# Altium PCB FPGA_board.PcbDoc (part 5 of 7)
Units mm, origin at the board's own origin, x right, y up, seen from the top; angles counter-clockwise.
Board outline 120 x 95 mm, 2 copper layers (Top Layer, Bottom Layer); 242 components, 219 nets, 1224 pads, 430 vias.
Unrouted connection lines stored in the file: 9.
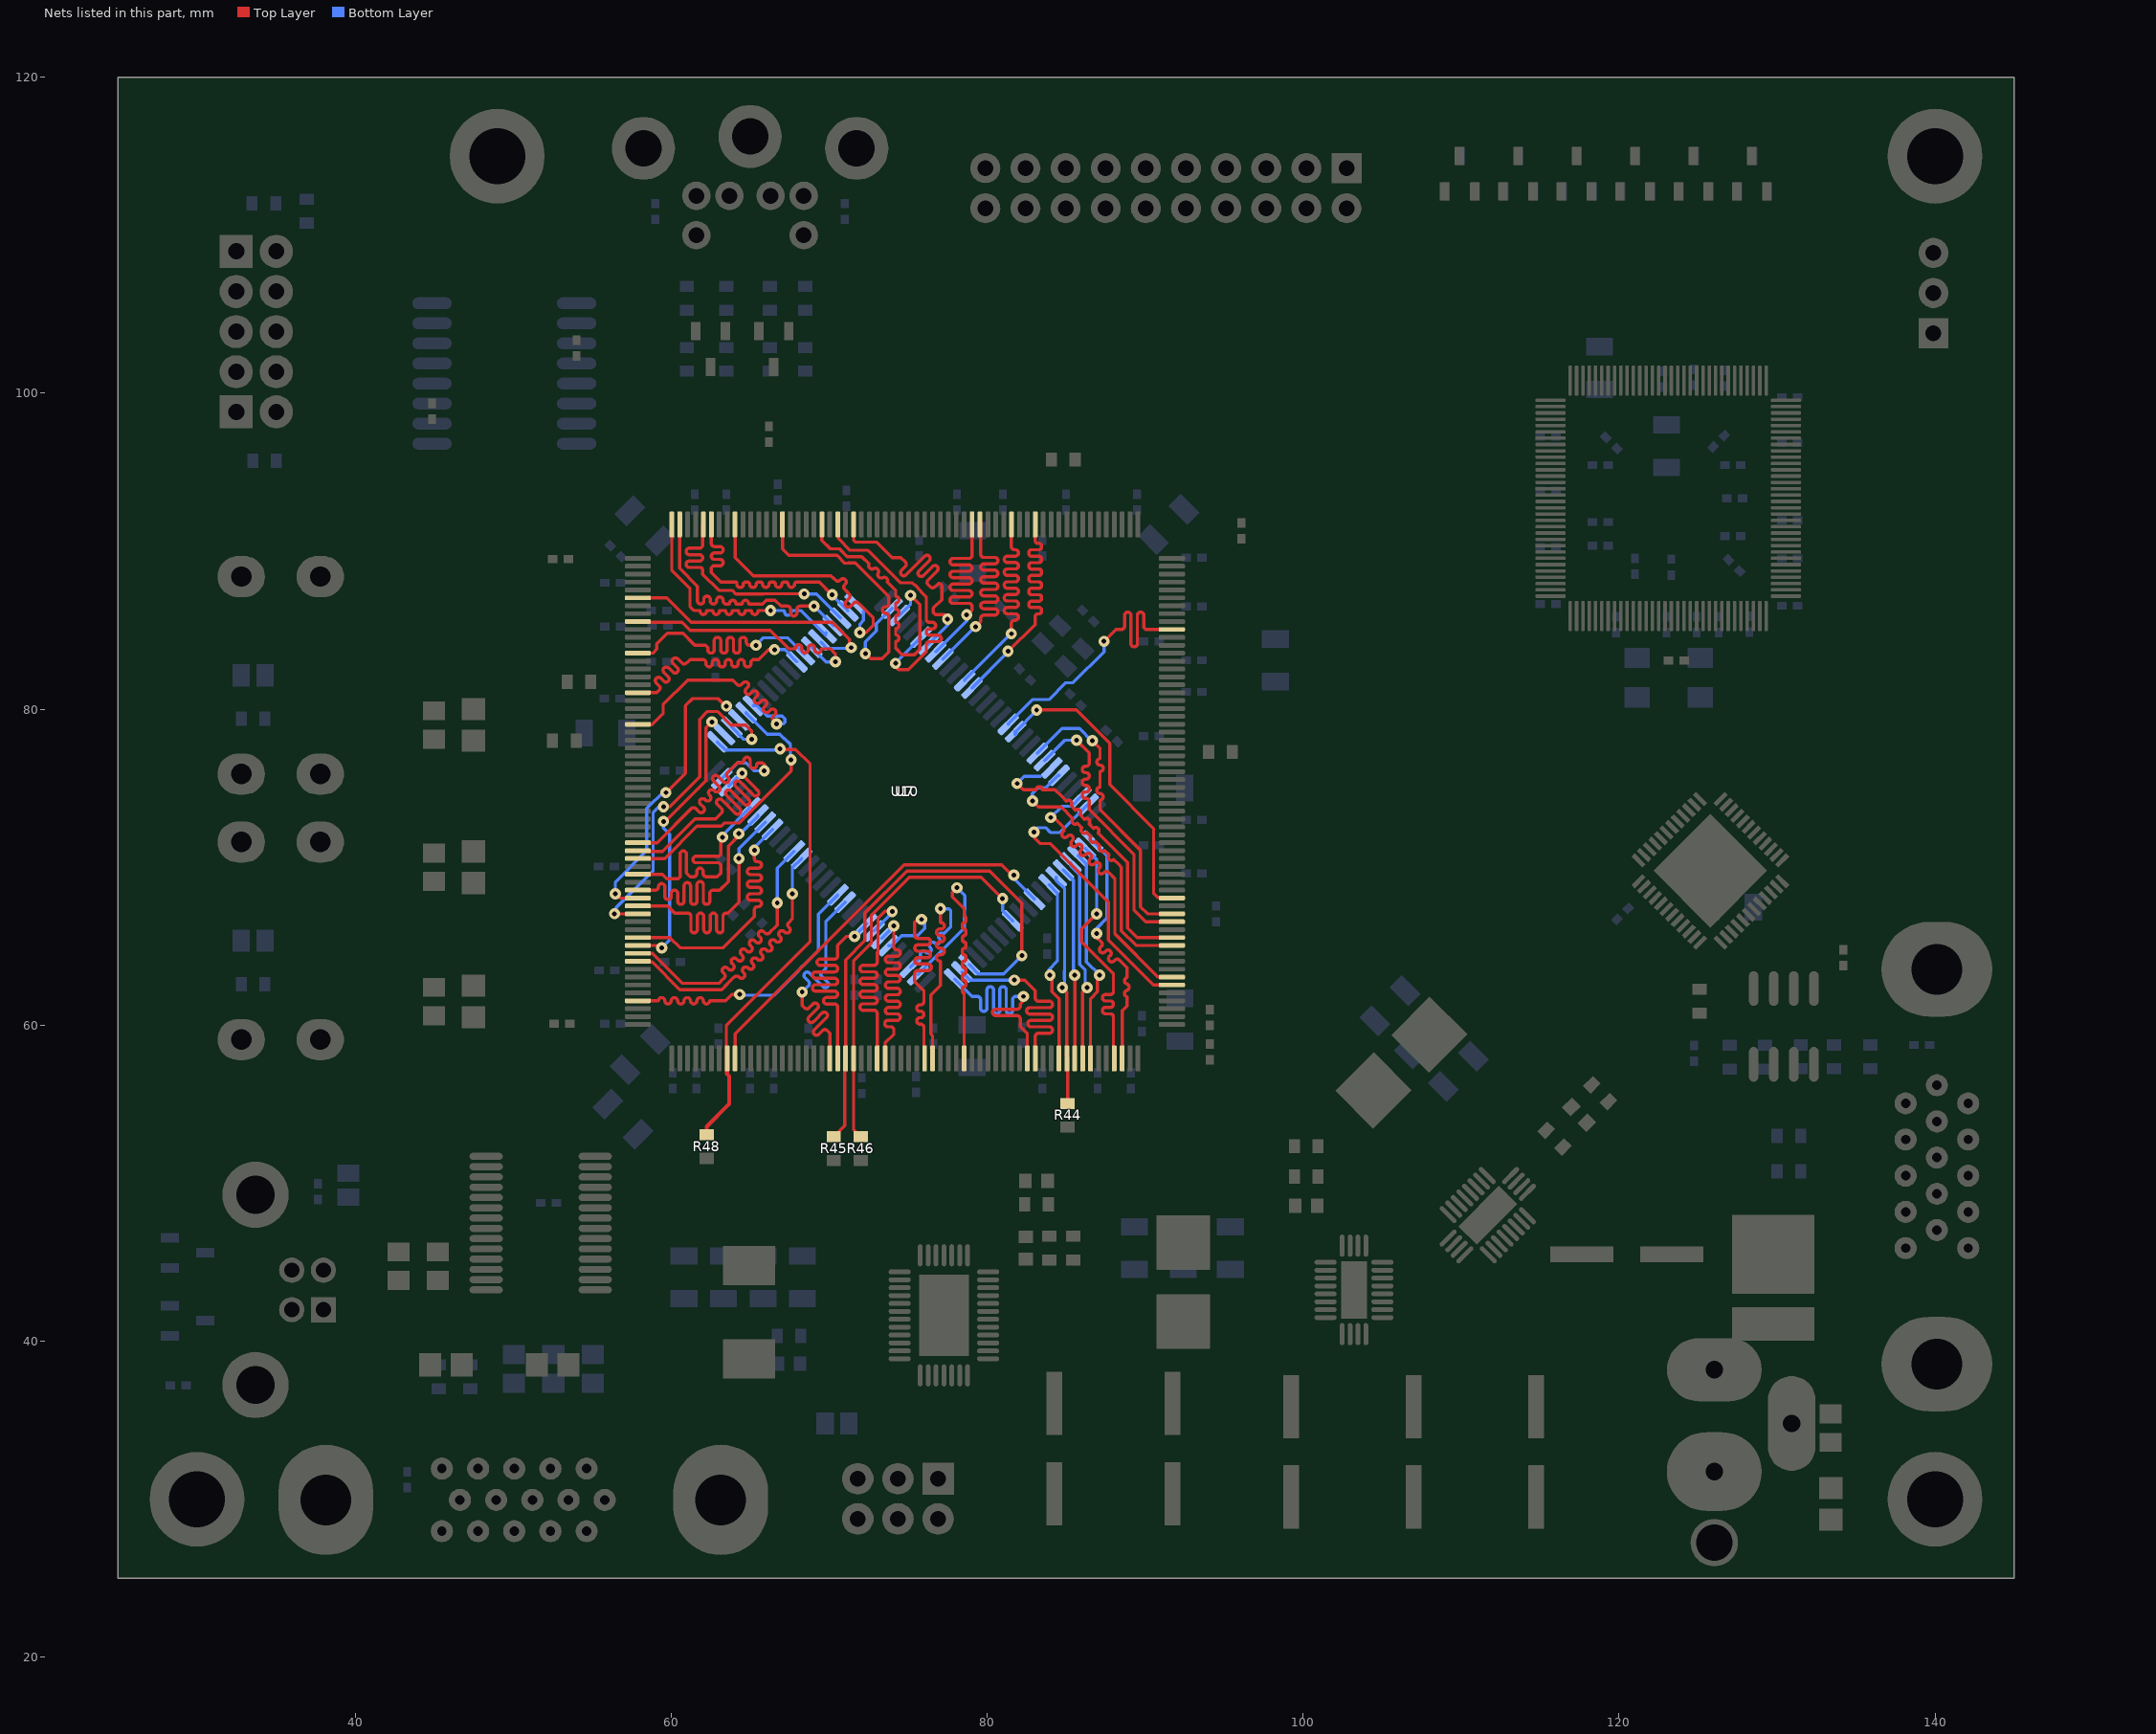
[diagram p5: the nets of this part, all layers, seen from the top]

## Via types
v1: diameter 0.71, hole 0.3, Top Layer to Bottom Layer, 393 vias
v2: diameter 1.4, hole 0.6, Top Layer to Bottom Layer, 32 vias
v3: diameter 2, hole 0.9, Top Layer to Bottom Layer, 4 vias
v4: diameter 1.2, hole 0.5, Top Layer to Bottom Layer, 1 vias

## Nets (pads, with @x,y where several pads share a name; then routed paths per layer and width w, separated by ;. In a path a pad name is that pad's centre, name@x,y a point inside that pad or via, vN(x,y) a via of type N, cw(c..) or ccw(c..) an arc to the next point about the centre after c; other vN are vias at no path point) (continued)
SRAM_ADDR1: U7.22 U10.36 | length 17.6
  Top Layer w0.203: U7.22@57.9,79.05 57.925,79.025 58.802,79.025 59.5,79.723 59.5,80.293 61.057,81.85 63.9,81.85 64.175,81.575 ccw(c64.319,81.719) 64.462,81.575 64.564,81.677 cw(c64.707,81.533) 64.851,81.677 cw(c64.707,81.533) 64.851,81.39 64.749,81.288 ccw(c64.893,81.144) 64.749,81.001 ccw(c64.893,81.144) 65.036,81.001 65.138,81.103 cw(c65.282,80.959) 65.425,81.103 cw(c65.282,80.959) 65.425,80.816 65.323,80.714 ccw(c65.467,80.57) 65.323,80.427 ccw(c65.467,80.57) 65.61,80.427 65.712,80.528 cw(c65.856,80.385) 65.999,80.528 cw(c65.856,80.385) 65.999,80.241 65.898,80.14 ccw(c66.041,79.996) 65.898,79.852 ccw(c66.041,79.996) 66.185,79.852 66.286,79.954 cw(c66.43,79.811) 66.574,79.954 cw(c66.43,79.811) 66.574,79.667 66.472,79.565 ccw(c66.615,79.422) 66.472,79.278 v1(66.675,79.075)
  Bottom Layer w0.203: U10.36@65.219,80.245 65.415,80.245 66.087,79.572 67.028,79.572 67.213,79.387 67.213,79.163 67.125,79.075 v1(66.675,79.075)
SRAM_ADDR2: U7.50 U10.32 | length 17.7
  Top Layer w0.203: U7.50@57.9,65.05 59.256,65.05 v1(59.406,64.9) ; v1@59.525,73.05 59.775,73.05 62.215,75.49 62.215,78.832 v1(62.586,79.204)
  Bottom Layer w0.203: v1@59.4,64.906 v1(59.406,64.9) 59.9,65.394 59.9,72.1 59.525,72.475 v1@59.525,73.05
  other v1: 59.525,72.9
SRAM_ADDR3: U7.46 U10.33 | length 22.4
  Top Layer w0.203: v1@56.52,67.255 56.52,67.105 56.575,67.05 U7.46@57.9,67.05 ; v1(59.525,73.827) 59.922,73.827 61.812,75.717 61.812,79.358 62.314,79.86 62.927,79.86 63.8,78.987 64.738,78.987 65.1,78.625 v1(65.1,78.1)
  Bottom Layer w0.203: v1@56.52,67.255 56.52,67.442 58.869,69.79 58.869,73.468 59.227,73.827 v1(59.525,73.827) ; U10.33@63.84,78.866 64.606,78.1 v1(65.1,78.1)
  other v1: 56.42,67.055
SRAM_ADDR4: U7.44 U10.34 | length 18.2
  Top Layer w0.203: v1(56.475,68.325) 56.75,68.05 U7.44@57.9,68.05 ; v1@59.839,74.889 60.9,75.95 60.9,80.225 61.35,80.675 62.972,80.675 v1@63.515,80.132 ; v1(63.511,80.204) 63.515,80.2 v1@63.515,80.11
  Bottom Layer w0.203: v1(56.475,68.325) 56.475,69.075 58.466,71.065 58.466,73.716 v1@59.575,74.825
  other v1: 59.675,74.725
SRAM_ADDR5: U7.39 U10.35 | length 17.3
  Top Layer w0.203: U7.39@57.9,70.55 59.6,70.55 61.65,72.6 63.17,72.6 63.37,72.8 64.3,72.8 67.6,76.1 v1(67.6,76.8)
  Bottom Layer w0.203: U10.35@64.759,79.785 64.759,79.741 66.081,78.418 66.882,78.418 67.144,78.156 67.172,78.156 67.556,77.772 67.556,76.844 v1(67.6,76.8)
SRAM_ADDR6: U7.18 U10.42 | length 17.3
  Top Layer w0.203: U7.18@57.9,81.05 59.1,81.05 59.25,81.2 ccw(c59.107,81.344) 59.25,81.487 59.064,81.673 cw(c59.207,81.817) 59.064,81.96 cw(c59.207,81.817) 59.351,81.96 59.537,81.774 ccw(c59.681,81.918) 59.824,81.774 ccw(c59.681,81.918) 59.824,82.061 59.555,82.33 cw(c59.699,82.474) 59.556,82.617 cw(c59.699,82.474) 59.843,82.617 60.111,82.348 ccw(c60.255,82.492) 60.398,82.348 ccw(c60.255,82.492) 60.398,82.635 60.13,82.904 cw(c60.273,83.048) 60.13,83.191 cw(c60.273,83.048) 60.417,83.191 60.685,82.923 ccw(c60.829,83.066) 60.973,82.923 61.025,82.975 61.2,83.15 62.006,83.15 cw(c62.006,82.947) 62.209,82.947 62.209,82.887 ccw(c62.412,82.887) 62.412,82.684 ccw(c62.412,82.887) 62.615,82.887 62.615,82.947 cw(c62.818,82.947) 62.818,83.15 cw(c62.818,82.947) 63.021,82.947 63.021,82.879 ccw(c63.224,82.879) 63.224,82.676 ccw(c63.224,82.879) 63.427,82.879 63.427,82.947 cw(c63.63,82.947) 63.63,83.15 cw(c63.63,82.947) 63.833,82.947 63.833,82.879 ccw(c64.036,82.879) 64.036,82.676 ccw(c64.036,82.879) 64.239,82.879 64.239,82.947 cw(c64.442,82.947) 64.442,83.15 cw(c64.442,82.947) 64.645,82.947 64.645,82.879 ccw(c64.848,82.879) 64.848,82.676 ccw(c64.848,82.879) 65.051,82.879 65.051,82.947 cw(c65.254,82.947) 65.254,83.15 65.55,83.15 66.175,83.775 v1(66.55,83.775)
  Bottom Layer w0.203: v1(66.55,83.775) 67.204,83.775 U10.42@67.976,83.002
SRAM_ADDR7: U7.13 U10.43 | length 17
  Top Layer w0.203: U7.13@57.9,83.55 58.85,83.55 59.1,83.8 59.1,84.128 59.772,84.8 60.75,84.8 61.5,84.05 62.18,84.05 62.33,83.9 62.33,83.753 ccw(c62.533,83.753) 62.533,83.55 ccw(c62.533,83.753) 62.736,83.753 62.736,84.347 cw(c62.939,84.347) 62.939,84.55 cw(c62.939,84.347) 63.142,84.347 63.142,83.753 ccw(c63.345,83.753) 63.345,83.55 ccw(c63.345,83.753) 63.548,83.753 63.548,84.347 cw(c63.751,84.347) 63.751,84.55 cw(c63.751,84.347) 63.954,84.347 63.954,83.753 ccw(c64.157,83.753) 64.157,83.55 ccw(c64.157,83.753) 64.36,83.753 64.36,84.347 cw(c64.563,84.347) 64.563,84.55 cw(c64.563,84.347) 64.766,84.347 64.766,84.253 ccw(c64.969,84.253) 64.969,84.05 v1(65.375,84.05)
  Bottom Layer w0.203: v1(65.375,84.05) 65.85,84.525 67.373,84.525 U10.43@68.436,83.462
SRAM_ADDR8: U7.9 U10.44 | length 17
  Top Layer w0.203: U7.9@57.9,85.55 57.949,85.501 60.704,85.501 61.205,85 66.28,85 67.455,83.825 67.826,83.825 ccw(c67.826,83.872) 67.873,83.872 cw(c68.076,83.872) 68.076,84.075 cw(c68.076,83.872) 68.279,83.872 68.279,83.778 ccw(c68.482,83.778) 68.482,83.575 ccw(c68.482,83.778) 68.685,83.778 68.685,83.872 cw(c68.888,83.872) 68.888,84.075 cw(c68.888,83.872) 69.091,83.872 69.091,83.778 ccw(c69.294,83.778) 69.294,83.575 ccw(c69.294,83.778) 69.497,83.778 cw(c69.544,83.778) 69.544,83.825 70.075,83.825 70.4,83.5 v1(70.4,83)
  Bottom Layer w0.203: U10.44@68.896,83.922 69.817,83 v1(70.4,83)
SRAM_ADDR9: U7.6 U10.45 | length 17.1
  Top Layer w0.203: U7.6@57.9,87.05 59.725,87.05 59.877,86.898 60.261,86.514 61.275,85.5 70.2,85.5 71.294,84.406 71.294,84.006 v1(71.4,83.9)
  Bottom Layer w0.203: U10.45@69.5,84.237 69.886,83.851 71.351,83.851 v1(71.4,83.9)
SRAM_ADDR10: U7.240 U10.46 | length 17
  Top Layer w0.203: U7.240@60.05,91.7 60.05,88.778 61.2,87.628 61.2,86.486 61.437,86.248 61.794,86.248 cw(c61.794,86.199) 61.843,86.199 ccw(c62.046,86.199) 62.046,85.996 ccw(c62.046,86.199) 62.249,86.199 cw(c62.298,86.199) 62.298,86.248 62.606,86.248 cw(c62.606,86.199) 62.655,86.199 ccw(c62.858,86.199) 62.858,85.996 ccw(c62.858,86.199) 63.061,86.199 cw(c63.11,86.199) 63.11,86.248 63.418,86.248 cw(c63.418,86.199) 63.467,86.199 ccw(c63.67,86.199) 63.67,85.996 ccw(c63.67,86.199) 63.873,86.199 cw(c63.922,86.199) 63.922,86.248 64.23,86.248 cw(c64.23,86.199) 64.279,86.199 ccw(c64.482,86.199) 64.482,85.996 ccw(c64.482,86.199) 64.685,86.199 cw(c64.734,86.199) 64.734,86.248 65.042,86.248 cw(c65.042,86.199) 65.091,86.199 ccw(c65.294,86.199) 65.294,85.996 ccw(c65.294,86.199) 65.497,86.199 cw(c65.546,86.199) 65.546,86.248 66.299,86.248 v1(66.3,86.25)
  Bottom Layer w0.203: v1(66.3,86.25) 67.084,86.25 cw(c67.084,86.143) 67.191,86.143 ccw(c67.394,86.143) 67.394,85.94 ccw(c67.394,86.143) 67.597,86.143 cw(c67.704,86.143) 67.704,86.25 68.21,86.25 69.775,84.685 69.775,84.801 U10.46@69.815,84.841
SRAM_ADDR11: U7.239 U10.47 | length 17.4
  Top Layer w0.203: U7.239@60.55,91.7 60.538,91.688 60.538,88.92 61.668,87.79 61.668,86.863 ccw(c61.871,86.863) 61.871,86.66 ccw(c61.871,86.863) 62.074,86.863 62.074,86.957 cw(c62.277,86.957) 62.277,87.16 cw(c62.277,86.957) 62.48,86.957 62.48,86.863 ccw(c62.683,86.863) 62.683,86.66 ccw(c62.683,86.863) 62.886,86.863 62.886,86.904 cw(c63.089,86.904) 63.089,87.107 cw(c63.089,86.904) 63.292,86.904 63.292,86.863 ccw(c63.495,86.863) 63.495,86.66 63.664,86.66 ccw(c63.664,86.694) 63.698,86.694 cw(c63.901,86.694) 63.901,86.897 cw(c63.901,86.694) 64.104,86.694 ccw(c64.138,86.694) 64.138,86.66 64.476,86.66 ccw(c64.476,86.694) 64.51,86.694 cw(c64.713,86.694) 64.713,86.897 cw(c64.713,86.694) 64.916,86.694 ccw(c64.95,86.694) 64.95,86.66 65.782,86.66 66.028,86.907 66.572,86.907 66.953,86.525 67.156,86.525 67.359,86.525 cw(c67.359,86.322) 67.562,86.322 67.562,86.106 ccw(c67.765,86.106) 67.765,85.903 ccw(c67.765,86.106) 67.968,86.106 67.968,86.322 cw(c68.171,86.322) 68.171,86.525 68.374,86.525 68.6,86.525 v1(69.05,86.525)
  Bottom Layer w0.203: v1(69.05,86.525) U10.47@70.275,85.301
SRAM_ADDR12: U7.236 U10.48 | length 16.7
  Top Layer w0.203: U7.236@62.05,91.7 62.002,91.651 62.002,90.8 62.002,90.597 62.002,90.394 cw(c61.799,90.394) 61.799,90.191 61.156,90.191 ccw(c61.156,89.988) 60.953,89.988 ccw(c61.156,89.988) 61.156,89.785 61.799,89.785 cw(c61.799,89.582) 62.002,89.582 cw(c61.799,89.582) 61.799,89.379 61.156,89.379 ccw(c61.156,89.176) 60.953,89.176 ccw(c61.156,89.176) 61.156,88.973 61.829,88.973 cw(c61.829,88.8) 62.002,88.8 62.002,88.536 63.016,87.522 63.88,87.522 64.102,87.3 ; 64.2,87.288 64.114,87.288 64.102,87.3 ; v1(68.425,87.3) 68.416,87.31 65.861,87.31 65.852,87.3 64.102,87.3
  Bottom Layer w0.203: v1(68.425,87.3) 69.204,87.3 70.734,85.769 U10.48@70.734,85.76
SRAM_ADDR13: U7.235 U10.49 | length 17
  Top Layer w0.203: U7.235@62.55,91.7 62.55,90.5 ccw(c62.753,90.5) 62.753,90.297 63.097,90.297 cw(c63.097,90.094) 63.3,90.094 cw(c63.097,90.094) 63.097,89.891 62.753,89.891 ccw(c62.753,89.688) 62.55,89.688 ccw(c62.753,89.688) 62.753,89.485 63.097,89.485 cw(c63.097,89.282) 63.3,89.282 cw(c63.097,89.282) 63.097,89.079 62.729,89.079 ccw(c62.729,88.9) 62.55,88.9 62.55,88.65 63.153,88.047 64.1,88.047 cw(c64.1,87.978) 64.168,87.978 64.168,87.906 ccw(c64.371,87.906) 64.371,87.703 ccw(c64.371,87.906) 64.574,87.906 cw(c64.715,87.906) 64.715,88.046 64.839,88.047 cw(c64.839,87.906) 64.98,87.906 ccw(c65.183,87.906) 65.183,87.703 ccw(c65.183,87.906) 65.386,87.906 cw(c65.527,87.906) 65.527,88.046 65.661,88.047 cw(c65.661,87.915) 65.792,87.915 ccw(c65.995,87.915) 65.995,87.712 ccw(c65.995,87.915) 66.198,87.915 cw(c66.329,87.915) 66.329,88.046 66.473,88.047 cw(c66.473,87.915) 66.604,87.915 ccw(c66.807,87.915) 66.807,87.712 ccw(c66.807,87.915) 67.01,87.915 cw(c67.141,87.915) 67.141,88.046 67.285,88.047 cw(c67.285,87.915) 67.416,87.915 ccw(c67.619,87.915) 67.619,87.712 ccw(c67.619,87.915) 67.822,87.915 cw(c67.953,87.915) 67.953,88.046 69.385,88.047 v1@70.191,87.241
  Bottom Layer w0.203: v1@70.182,87.232 U10.49@71.194,86.22
  other v1: 70.2,87.25
SRAM_ADDR14: U7.232 U10.50 | length 19.8
  Top Layer w0.203: U7.232@64.05,91.7 64.069,91.681 64.069,89.581 64.2,89.45 64.344,89.307 64.631,89.019 64.918,88.732 65.2,88.45 65.403,88.45 65.809,88.45 ; 66.215,88.45 65.809,88.45 ; 66.621,88.45 65.809,88.45 ; 67.027,88.45 65.809,88.45 ; 69.463,88.45 69.869,88.45 ; v1(71.95,84.85) 72.325,84.85 72.8,85.325 72.8,85.775 71.988,86.587 71.848,86.727 ccw(c71.704,86.584) 71.56,86.727 71.353,86.52 cw(c71.209,86.663) 71.065,86.52 cw(c71.209,86.663) 71.065,86.807 71.273,87.015 ccw(c71.13,87.158) 71.273,87.302 71.13,87.445 70.986,87.589 cw(c71.13,87.732) 70.986,87.876 71.028,87.917 ccw(c70.884,88.061) 71.028,88.205 ccw(c70.884,88.061) 70.741,88.205 70.699,88.163 cw(c70.556,88.306) 70.412,88.163 70.269,88.306 70.125,88.45 69.869,88.45 ; 65.809,88.45 67.433,88.45 67.839,88.45 68.245,88.45 68.651,88.45 69.057,88.45 69.869,88.45
  Bottom Layer w0.203: v1(71.95,84.85) 71.95,85.383 72.184,85.617 U10.50@72.184,86.187
SRAM_ADDR15: U7.118 U10.81 | length 17
  Top Layer w0.203: v1(86.938,65.803) 86.938,65.562 87.227,65.273 cw(c87.083,65.13) 87.227,64.986 87.174,64.933 ccw(c87.317,64.79) 87.174,64.646 ccw(c87.317,64.79) 87.461,64.646 87.514,64.699 cw(c87.657,64.556) 87.801,64.699 cw(c87.657,64.556) 87.801,64.412 87.748,64.359 ccw(c87.891,64.216) 87.748,64.072 ccw(c87.891,64.216) 88.035,64.072 88.088,64.125 cw(c88.231,63.981) 88.375,64.125 88.85,63.65 88.85,63.019 ccw(c88.912,62.816) 88.85,62.613 cw(c88.788,62.41) 88.85,62.207 ccw(c88.912,62.004) 88.85,61.801 88.85,61.225 88.55,60.925 U7.118@88.55,57.9
  Bottom Layer w0.203: U10.81@86.679,71.653 87.594,70.739 87.594,66.781 86.938,66.125 v1(86.938,65.803)
SRAM_ADDR16: U7.117 U10.82 | length 17.2
  Top Layer w0.203: v1(86.938,67.053) 85.975,66.091 85.975,65.275 88.002,63.248 88.002,62.55 88.002,62.347 88.002,62.144 cw(c87.799,62.144) 87.799,61.941 87.505,61.941 ccw(c87.505,61.738) 87.302,61.738 ccw(c87.505,61.738) 87.505,61.535 87.799,61.535 cw(c87.799,61.332) 88.002,61.332 cw(c87.799,61.332) 87.799,61.129 87.505,61.129 ccw(c87.505,60.926) 87.302,60.926 ccw(c87.505,60.926) 87.505,60.723 87.799,60.723 cw(c87.799,60.52) 88.002,60.52 ; 88.002,60.317 88.002,60.52 ; U7.117@88.05,57.9 88.002,57.948 88.002,60.075 88.002,60.52
  Bottom Layer w0.203: U10.82@86.22,71.194 86.938,70.476 v1(86.938,67.053)
SRAM_ADDR17: U7.107 U10.99 | length 17
  Top Layer w0.203: v1(81.732,62.86) 82.39,62.86 83.05,62.2 83.05,61.725 ccw(c83.253,61.725) 83.253,61.522 83.944,61.522 cw(c83.944,61.319) 84.147,61.319 cw(c83.944,61.319) 83.944,61.116 82.706,61.116 ccw(c82.706,60.913) 82.503,60.913 ccw(c82.706,60.913) 82.706,60.71 83.944,60.71 cw(c83.944,60.507) 84.147,60.507 cw(c83.944,60.507) 83.944,60.304 82.781,60.304 ccw(c82.781,60.101) 82.578,60.101 ccw(c82.781,60.101) 82.781,59.898 83.944,59.898 cw(c83.944,59.695) 84.147,59.695 cw(c83.944,59.695) 83.944,59.492 83.253,59.492 ccw(c83.253,59.289) 83.05,59.289 U7.107@83.05,57.9
  Bottom Layer w0.203: U10.99@78.406,63.38 78.937,62.85 81.722,62.85 v1(81.732,62.86)
SRAM_ADDR18: U7.106 U10.100 | length 19.9
  Top Layer w0.203: v1(82.3,61.825) 82.3,61.55 82.1,61.35 82.1,61.219 cw(c81.897,61.219) 81.897,61.016 80.553,61.016 ccw(c80.553,60.813) 80.35,60.813 ccw(c80.553,60.813) 80.553,60.61 81.897,60.61 cw(c81.897,60.407) 82.1,60.407 82.1,59.925 82.55,59.475 U7.106@82.55,57.9
  Bottom Layer w0.203: U10.100@77.947,62.921 79.042,61.825 79.375,61.825 79.389,61.825 cw(c79.389,61.622) 79.592,61.622 79.592,61.079 ccw(c79.795,61.079) 79.795,60.876 ccw(c79.795,61.079) 79.998,61.079 79.998,61.825 79.998,62.244 cw(c80.201,62.244) 80.201,62.447 cw(c80.201,62.244) 80.404,62.244 80.404,61.825 80.404,60.928 ccw(c80.607,60.928) 80.607,60.725 ccw(c80.607,60.928) 80.81,60.928 80.81,61.825 80.81,62.244 cw(c81.013,62.244) 81.013,62.447 cw(c81.013,62.244) 81.216,62.244 81.216,61.825 81.216,60.928 ccw(c81.419,60.928) 81.419,60.725 ccw(c81.419,60.928) 81.622,60.928 81.622,61.622 cw(c81.825,61.622) 81.825,61.825 v1(82.3,61.825)
SRAM_ADSC_N: U7.112 U10.85 | length 12.2
  Top Layer w0.203: U7.112@85.55,57.9 v1(85.55,63.175)
  Bottom Layer w0.203: U10.85@84.841,69.815 85.469,69.187 85.469,63.256 v1(85.55,63.175)
SRAM_ADSP_N: U7.113 U10.84 | length 12.9
  Top Layer w0.203: U7.113@86.05,57.9 86.05,62.105 v1(86.335,62.39)
  Bottom Layer w0.203: U10.84@85.301,70.275 85.301,70.079 85.872,69.507 85.872,63.853 86.207,63.518 86.207,62.518 v1(86.335,62.39)
SRAM_ADV_N: U7.114 U10.83 | length 13.7
  Top Layer w0.203: U7.114@86.55,57.9 86.548,57.902 86.548,61.675 86.991,62.118 86.991,63.047 v1(87.12,63.175)
  Bottom Layer w0.203: U10.83@85.76,70.734 86.29,70.204 86.29,67.334 86.281,67.325 86.281,66.781 86.29,66.772 86.29,66.084 86.281,66.075 86.281,65.531 86.29,65.522 86.29,64.004 v1(87.12,63.175)
SRAM_BWE_N: U7.110 U10.87 | length 11.7
  Top Layer w0.203: v1(83.98,63.175) 84.109,63.047 84.109,62.118 84.55,61.677 U7.110@84.55,57.9
  Bottom Layer w0.203: U10.87@83.922,68.896 84.452,68.365 84.452,64.052 83.922,63.522 83.922,63.234 v1(83.98,63.175)
SRAM_CE2_N: R46.1 U7.84 U10.92 | length 26.2
  Top Layer w0.203: R46.1@72,52.95 71.55,53.4 U7.84@71.55,57.9 71.55,64.068 72.671,65.189 72.671,66.941 75.087,69.356 79.635,69.356 v1(80.981,68.011)
  Bottom Layer w0.203: v1(80.981,68.011) 80.981,67.24 U10.92@81.624,66.598
SRAM_CE_N: R45.2 U7.83 U10.98 | length 34.3
  Top Layer w0.203: R45.2@70.3,52.95 71.002,53.652 71.002,57.852 U7.83@71.099,57.949 ; U7.83@71.05,57.9 71.05,64.138 72.268,65.356 72.268,67.108 74.92,69.76 80.161,69.76 82.2,67.72 v1(82.2,64.4)
  Bottom Layer w0.203: U10.98@78.866,63.84 79.453,63.253 81.053,63.253 v1(82.2,64.4)
SRAM_CLK: U7.69 U10.89 | length 26
  Top Layer w0.203: U7.69@64.05,57.9 64.05,59.46 74.753,70.163 80.938,70.163 81.6,69.5 v1(81.7,69.5)
  Bottom Layer w0.203: v1(81.7,69.5) 81.7,69.279 U10.89@83.002,67.976
SRAM_DQ0: U7.226 U10.52 | length 18.9
  Top Layer w0.203: U7.226@67.05,91.7 67.05,90.15 67.45,89.75 70.495,89.75 71.001,89.244 71.21,89.244 71.219,89.253 71.664,89.253 73.775,87.142 73.775,86.75 73.775,86.681 cw(c73.578,86.681) 73.578,86.484 ccw(c73.578,86.281) 73.375,86.281 ccw(c73.578,86.281) 73.578,86.078 cw(c73.578,85.881) 73.775,85.881 73.775,85.875 73.775,83.625 73.35,83.2 72.625,83.2 v1(72.3,83.525)
  Bottom Layer w0.203: v1(72.3,83.525) 72.3,84.25 73,84.95 73,85.41 U10.52@73.987,86.397
SRAM_DQ1: U7.221 U10.53 | length 19.2
  Top Layer w0.203: U7.221@69.55,91.7 69.55,90.675 70.072,90.153 70.662,90.153 71.159,89.656 72.069,89.656 72.537,89.188 ccw(c72.725,89.088) 72.824,88.901 cw(c72.924,88.713) 73.111,88.614 ccw(c73.299,88.514) 73.398,88.327 cw(c73.498,88.139) 73.685,88.04 74.221,87.505 74.221,87.138 cw(c74.221,86.935) 74.221,86.732 74.221,86.326 cw(c74.221,86.123) 74.221,85.92 74.221,85.514 cw(c74.221,85.311) 74.221,85.108 74.221,84.702 cw(c74.221,84.499) 74.221,84.296 74.221,83.854 74.625,83.45 75.4,83.45 75.75,83.8 75.75,86.616 v1(75.162,87.204)
  Bottom Layer w0.203: U10.53@74.446,85.937 75.162,86.652 v1(75.162,87.204)
SRAM_DQ2: U7.219 U10.56 | length 18.9
  Top Layer w0.203: U7.219@70.55,91.7 70.599,91.651 70.599,90.794 71.334,90.059 72.465,90.059 74.524,88 75.275,88 75.414,87.861 75.434,87.861 75.818,87.476 75.818,87.457 76.153,87.122 76.153,85.7 ccw(c76.356,85.7) 76.356,85.497 76.548,85.497 cw(c76.548,85.294) 76.751,85.294 cw(c76.548,85.294) 76.548,85.091 76.356,85.091 ccw(c76.356,84.888) 76.153,84.888 ccw(c76.356,84.888) 76.356,84.685 76.9,84.685 cw(c76.9,84.482) 77.103,84.482 cw(c76.9,84.482) 76.9,84.279 76.356,84.279 ccw(c76.356,84.076) 76.153,84.076 76.153,83.633 75.02,82.5 74.4,82.5 74.212,82.688 v1(74.212,82.904)
  Bottom Layer w0.203: v1(74.212,82.904) 74.212,82.945 U10.56@75.825,84.558
SRAM_DQ3: U7.217 U10.57 | length 18.9
  Top Layer w0.203: U7.217@71.55,91.7 71.55,90.712 71.688,90.574 73.027,90.574 74,89.6 74.55,89.6 74.828,89.322 cw(c74.684,89.179) 74.828,89.035 74.587,88.794 ccw(c74.731,88.651) 74.587,88.507 ccw(c74.731,88.651) 74.874,88.507 76.052,89.685 cw(c76.196,89.542) 76.34,89.685 cw(c76.196,89.542) 76.34,89.398 75.689,88.748 ccw(c75.833,88.604) 75.689,88.461 ccw(c75.833,88.604) 75.976,88.461 76.556,89.041 cw(c76.7,88.897) 76.843,89.041 cw(c76.7,88.897) 76.843,88.754 76.263,88.174 ccw(c76.407,88.03) 76.263,87.887 76.407,87.743 ccw(c76.55,87.887) 76.694,87.743 76.708,87.743 76.932,87.968 cw(c76.932,87.765) 77.135,87.765 77.135,86.935 76.6,86.4 76.6,86.1 76.616,86.1 76.716,86 77.3,86 77.5,85.8 v1(77.5,85.7)
  Bottom Layer w0.203: U10.57@76.285,84.098 77.5,85.313 v1(77.5,85.7)
SRAM_DQ4: U7.202 U10.58 | length 18.8
  Top Layer w0.203: v1(78.712,85.979) 78.754,85.979 79.05,86.275 79.05,86.5 ccw(c78.847,86.5) 78.847,86.703 77.853,86.703 cw(c77.853,86.906) 77.65,86.906 cw(c77.853,86.906) 77.853,87.109 78.847,87.109 ccw(c78.847,87.312) 79.05,87.312 ccw(c78.847,87.312) 78.847,87.515 77.853,87.515 cw(c77.853,87.718) 77.65,87.718 cw(c77.853,87.718) 77.853,87.921 78.847,87.921 ccw(c78.847,88.124) 79.05,88.124 ccw(c78.847,88.124) 78.847,88.327 77.853,88.327 cw(c77.853,88.53) 77.65,88.53 cw(c77.853,88.53) 77.853,88.733 78.847,88.733 ccw(c78.847,88.936) 79.05,88.936 ccw(c78.847,88.936) 78.847,89.139 77.853,89.139 cw(c77.853,89.342) 77.65,89.342 cw(c77.853,89.342) 77.853,89.545 78.847,89.545 ccw(c78.847,89.748) 79.05,89.748 79.05,89.951 79.05,90 U7.202@79.05,91.7
  Bottom Layer w0.203: U10.58@76.745,83.639 78.712,85.606 v1(78.712,85.979)
SRAM_DQ5: U7.201 U10.59 | length 18.9
  Top Layer w0.203: v1(79.275,85.225) 79.599,85.548 79.599,85.55 79.599,85.753 cw(c79.802,85.753) 79.802,85.956 80.485,85.956 ccw(c80.485,86.159) 80.688,86.159 ccw(c80.485,86.159) 80.485,86.362 79.802,86.362 cw(c79.802,86.565) 79.599,86.565 cw(c79.802,86.565) 79.802,86.768 80.485,86.768 ccw(c80.485,86.971) 80.688,86.971 ccw(c80.485,86.971) 80.485,87.174 79.802,87.174 cw(c79.802,87.377) 79.599,87.377 cw(c79.802,87.377) 79.802,87.58 80.485,87.58 ccw(c80.485,87.783) 80.688,87.783 ccw(c80.485,87.783) 80.485,87.986 79.802,87.986 cw(c79.802,88.189) 79.599,88.189 cw(c79.802,88.189) 79.802,88.392 80.485,88.392 ccw(c80.485,88.595) 80.688,88.595 ccw(c80.485,88.595) 80.485,88.798 79.802,88.798 cw(c79.802,89.001) 79.599,89.001 cw(c79.802,89.001) 79.802,89.204 80.485,89.204 ccw(c80.485,89.407) 80.688,89.407 ccw(c80.485,89.407) 80.485,89.61 79.802,89.61 cw(c79.802,89.813) 79.599,89.813 79.599,90.016 79.599,90.422 79.599,90.625 U7.201@79.599,91.875
  Bottom Layer w0.203: U10.59@77.204,83.179 79.25,85.225 v1(79.275,85.225)
SRAM_DQ6: U7.197 U10.62 | length 19
  Top Layer w0.203: v1(81.537,84.779) 81.537,85.428 cw(c81.74,85.428) 81.74,85.631 81.784,85.631 ccw(c81.784,85.834) 81.987,85.834 ccw(c81.784,85.834) 81.784,86.037 81.29,86.037 cw(c81.29,86.24) 81.087,86.24 cw(c81.29,86.24) 81.29,86.443 81.784,86.443 ccw(c81.784,86.646) 81.987,86.646 ccw(c81.784,86.646) 81.784,86.849 81.29,86.849 cw(c81.29,87.052) 81.087,87.052 cw(c81.29,87.052) 81.29,87.255 81.784,87.255 ccw(c81.784,87.458) 81.987,87.458 ccw(c81.784,87.458) 81.784,87.661 81.29,87.661 cw(c81.29,87.864) 81.087,87.864 cw(c81.29,87.864) 81.29,88.067 81.784,88.067 ccw(c81.784,88.27) 81.987,88.27 ccw(c81.784,88.27) 81.784,88.473 81.29,88.473 cw(c81.29,88.676) 81.087,88.676 cw(c81.29,88.676) 81.29,88.879 81.784,88.879 ccw(c81.784,89.082) 81.987,89.082 ccw(c81.784,89.082) 81.784,89.285 81.29,89.285 cw(c81.29,89.488) 81.087,89.488 cw(c81.29,89.488) 81.29,89.691 81.784,89.691 ccw(c81.784,89.894) 81.987,89.894 ccw(c81.784,89.894) 81.784,90.097 81.74,90.097 cw(c81.74,90.3) 81.537,90.3 81.537,91.687 U7.197@81.55,91.7
  Bottom Layer w0.203: U10.62@78.583,81.8 78.583,81.862 81.5,84.779 v1(81.537,84.779)
SRAM_DQ7: U7.194 U10.63 | length 19.2
  Top Layer w0.203: v1(81.325,83.675) 81.362,83.675 83.05,85.363 83.05,85.55 83.05,85.869 cw(c83.212,85.869) 83.212,86.031 83.288,86.031 ccw(c83.288,86.193) 83.45,86.193 83.45,86.275 ccw(c83.288,86.275) 83.288,86.437 82.812,86.437 cw(c82.812,86.599) 82.65,86.599 82.65,86.681 cw(c82.812,86.681) 82.812,86.843 83.288,86.843 ccw(c83.288,87.005) 83.45,87.005 83.45,87.087 ccw(c83.288,87.087) 83.288,87.249 82.812,87.249 cw(c82.812,87.411) 82.65,87.411 82.65,87.493 cw(c82.812,87.493) 82.812,87.655 83.288,87.655 ccw(c83.288,87.817) 83.45,87.817 83.45,87.899 ccw(c83.288,87.899) 83.288,88.061 82.812,88.061 cw(c82.812,88.223) 82.65,88.223 82.65,88.305 cw(c82.812,88.305) 82.812,88.467 83.288,88.467 ccw(c83.288,88.629) 83.45,88.629 83.45,88.711 ccw(c83.288,88.711) 83.288,88.873 82.812,88.873 cw(c82.812,89.035) 82.65,89.035 82.65,89.117 cw(c82.812,89.117) 82.812,89.279 83.288,89.279 ccw(c83.288,89.441) 83.45,89.441 83.45,89.523 ccw(c83.288,89.523) 83.288,89.685 82.812,89.685 cw(c82.812,89.847) 82.65,89.847 82.65,89.929 cw(c82.812,89.929) 82.812,90.091 83.288,90.091 ccw(c83.288,90.253) 83.45,90.253 83.45,90.335 ccw(c83.288,90.335) 83.288,90.497 83.212,90.497 cw(c83.212,90.659) 83.05,90.659 U7.194@83.05,91.7
  Bottom Layer w0.203: U10.63@79.043,81.341 81.351,83.649 v1(81.325,83.675)
SRAM_DQ8: U7.171 U10.68 | length 19.2
  Top Layer w0.203: v1(87.4,84.3) 88.15,85.05 88.5,85.05 ; 88.5,85.05 ccw(c88.5,85.253) 88.703,85.253 88.703,85.947 cw(c88.906,85.947) 88.906,86.15 cw(c88.906,85.947) 89.109,85.947 89.109,84.153 ccw(c89.312,84.153) 89.312,83.95 ccw(c89.312,84.153) 89.515,84.153 89.515,85.947 cw(c89.718,85.947) 89.718,86.15 cw(c89.718,85.947) 89.921,85.947 89.921,85.229 ccw(c90.1,85.229) 90.1,85.05 ; 90.1,85.05 U7.171@91.7,85.05
  Bottom Layer w0.203: U10.68@81.341,79.043 81.341,79.086 82.865,80.61 83.91,80.61 84.975,81.675 85.45,81.675 87.4,83.625 v1(87.4,84.3)
SRAM_DQ9: U7.137 U10.69 | length 19.5
  Top Layer w0.203: v1(83.137,79.954) 85.641,79.954 87.765,77.83 87.765,75.235 90.539,72.461 90.539,68.354 90.794,68.099 91.652,68.099 U7.137@91.7,68.05
  Bottom Layer w0.203: U10.69@81.8,78.583 83.137,79.92 v1(83.137,79.954)
  Bottom Layer w0.254: U10.69@81.8,78.423 U10.69@81.8,78.583
SRAM_DQ10: U7.135 U10.72 | length 19.3
  Top Layer w0.203: v1(86.663,78.004) 87.15,77.516 87.15,76.869 ccw(c87.153,76.666) 87.15,76.463 cw(c87.147,76.26) 87.15,76.057 87.15,75.068 ccw(c87.153,74.865) 87.15,74.662 cw(c87.147,74.459) 87.15,74.256 87.15,73.625 89.7,71.075 89.7,67.5 90.15,67.05 U7.135@91.7,67.05
  Bottom Layer w0.203: U10.72@83.179,77.204 84.753,78.778 85.85,78.778 86.625,78.004 v1(86.663,78.004)
SRAM_DQ11: U7.134 U10.73 | length 19.2
  Top Layer w0.203: v1(85.66,78.04) 86.475,77.225 86.475,76.594 cw(c86.272,76.594) 86.272,76.391 86.228,76.391 ccw(c86.228,76.188) 86.025,76.188 ccw(c86.228,76.188) 86.228,75.985 86.272,75.985 cw(c86.272,75.782) 86.475,75.782 cw(c86.272,75.782) 86.272,75.579 86.228,75.579 ccw(c86.228,75.376) 86.025,75.376 ccw(c86.228,75.376) 86.228,75.173 86.272,75.173 cw(c86.272,74.97) 86.475,74.97 cw(c86.272,74.97) 86.272,74.767 86.228,74.767 ccw(c86.228,74.564) 86.025,74.564 ccw(c86.228,74.564) 86.228,74.361 86.272,74.361 cw(c86.272,74.158) 86.475,74.158 86.475,73.65 89.297,70.828 89.297,67.303 90.05,66.55 U7.134@91.7,66.55
  Bottom Layer w0.203: U10.73@83.639,76.745 84.935,78.04 v1(85.66,78.04)
SRAM_DQ12: U7.132 U10.74 | length 19.3
  Top Layer w0.203: v1(81.9,75.3) 82.3,74.9 82.9,74.9 83.103,74.9 cw(c83.303,74.9) 83.303,75.1 83.309,75.1 cw(c83.309,74.9) 83.509,74.9 83.915,74.9 84.3,74.9 ; 84.444,74.756 84.3,74.9 ; U7.132@91.7,65.55 89.496,65.55 88.894,66.152 88.894,70.306 87.25,71.95 87.027,72.173 ccw(c86.886,72.314) 87.027,72.456 87.023,72.46 ccw(c86.882,72.318) 86.74,72.46 86.453,72.747 ccw(c86.312,72.888) 86.453,73.03 86.449,73.034 ccw(c86.308,72.893) 86.166,73.034 85.879,73.321 ccw(c85.738,73.462) 85.879,73.604 85.875,73.608 ccw(c85.733,73.467) 85.592,73.608 85.305,73.895 ccw(c85.163,74.037) 85.305,74.178 85.301,74.182 ccw(c85.159,74.041) 85.018,74.182 84.731,74.469 84.3,74.9
  Bottom Layer w0.203: v1(81.9,75.3) 82.355,75.755 83.372,75.755
SRAM_DQ13: U7.131 U10.75 | length 18.9
  Top Layer w0.203: v1(82.875,74.2) 83.269,73.807 84.694,73.807 85,73.5 85.144,73.356 85.431,73.069 ccw(c85.572,72.928) 85.431,72.787 85.435,72.782 ccw(c85.576,72.924) 85.718,72.782 86.005,72.495 ccw(c86.146,72.354) 86.005,72.212 86.009,72.208 ccw(c86.15,72.35) 86.292,72.208 86.579,71.921 ccw(c86.72,71.78) 86.579,71.638 86.583,71.634 ccw(c86.725,71.775) 86.866,71.634 87.153,71.347 ccw(c87.295,71.205) 87.153,71.064 87.157,71.06 ccw(c87.299,71.201) 87.44,71.06 87.727,70.773 ccw(c87.869,70.631) 87.727,70.49 87.732,70.486 ccw(c87.873,70.627) 88.014,70.486 88.301,70.199 88.491,70.009 88.491,69.806 ; 88.491,70 88.491,65.985 89.426,65.05 U7.131@91.7,65.05
  Bottom Layer w0.203: v1(82.875,74.2) 82.875,74.675 83.225,75.025 83.7,75.025 84.5,75.825 U10.75@84.558,75.825
SRAM_DQ14: U7.127 U10.78 | length 19.1
  Top Layer w0.203: v1(84.025,73.15) 84.219,73.15 84.535,72.835 84.678,72.691 84.822,72.547 cw(c84.678,72.404) 84.822,72.26 84.791,72.229 ccw(c84.934,72.086) 84.791,71.942 ccw(c84.934,72.086) 85.078,71.942 85.109,71.973 cw(c85.252,71.83) 85.396,71.973 cw(c85.252,71.83) 85.396,71.686 85.365,71.655 ccw(c85.508,71.512) 85.365,71.368 ccw(c85.508,71.512) 85.652,71.368 85.683,71.399 cw(c85.826,71.256) 85.97,71.399 cw(c85.826,71.256) 85.97,71.112 85.939,71.081 ccw(c86.082,70.937) 85.939,70.794 ccw(c86.082,70.937) 86.226,70.794 86.257,70.825 cw(c86.401,70.681) 86.544,70.825 cw(c86.401,70.681) 86.544,70.538 86.513,70.507 ccw(c86.657,70.363) 86.513,70.22 ccw(c86.657,70.363) 86.8,70.22 86.831,70.251 cw(c86.975,70.107) 87.118,70.251 cw(c86.975,70.107) 87.118,69.964 87.087,69.933 ccw(c87.231,69.789) 87.087,69.646 ccw(c87.231,69.789) 87.374,69.646 87.405,69.677 cw(c87.549,69.533) 87.693,69.677 87.735,69.635 88.088,69.281 88.088,65.805 90.843,63.05 U7.127@91.7,63.05
  Bottom Layer w0.203: v1(84.025,73.15) 84.735,73.86 85.35,73.86 U10.78@85.937,74.446
SRAM_DQ15: U7.126 U10.79 | length 18.9
  Top Layer w0.203: v1(82.975,72.225) 82.975,71.875 83.35,71.5 83.975,71.5 87.685,67.79 87.685,65.402 90.537,62.55 U7.126@91.7,62.55
  Bottom Layer w0.203: v1@82.825,72.075 v1@82.975,72.075 ; v1(82.975,72.225) 82.975,72.275 83.2,72.5 83.7,72.5 84,72.2 84.61,72.2 U10.79@86.397,73.987
SRAM_DQ16: U7.98 U10.2 | length 19.5
  Top Layer w0.203: v1(78.1,68.7) 77.8,68.4 77.8,68.123 78.55,67.373 78.55,67.1 78.55,66.897 cw(c78.55,66.797) 78.65,66.797 78.65,66.591 cw(c78.55,66.591) 78.55,66.491 ccw(c78.55,66.391) 78.45,66.391 78.45,66.185 ccw(c78.55,66.185) 78.55,66.085 cw(c78.55,65.985) 78.65,65.985 78.65,65.779 cw(c78.55,65.779) 78.55,65.679 ccw(c78.55,65.579) 78.45,65.579 78.45,65.373 ccw(c78.55,65.373) 78.55,65.273 cw(c78.55,65.173) 78.65,65.173 78.65,64.967 cw(c78.55,64.967) 78.55,64.867 ccw(c78.55,64.767) 78.45,64.767 78.45,64.561 ccw(c78.55,64.561) 78.55,64.461 cw(c78.55,64.361) 78.65,64.361 78.65,64.155 cw(c78.55,64.155) 78.55,64.055 ccw(c78.55,63.955) 78.45,63.955 78.45,63.749 ccw(c78.55,63.749) 78.55,63.649 cw(c78.55,63.549) 78.65,63.549 78.65,63.343 cw(c78.55,63.343) 78.55,63.243 ccw(c78.55,63.143) 78.45,63.143 78.45,62.937 ccw(c78.55,62.937) 78.55,62.837 cw(c78.55,62.737) 78.65,62.737 78.65,62.531 cw(c78.55,62.531) 78.55,62.431 ccw(c78.55,62.331) 78.45,62.331 78.45,62.125 ccw(c78.55,62.125) 78.55,62.025 78.55,61.925 78.55,60.155 U7.98@78.55,57.9
  Bottom Layer w0.203: U10.2@75.613,63.203 78.555,66.145 78.555,67.3 78.6,67.345 78.6,68.2 v1(78.1,68.7)
SRAM_DQ17: U7.94 U10.3 | length 18.2
  Top Layer w0.203: U7.94@76.55,57.9 76.55,59.352 76.44,59.461 76.44,61.915 77.05,62.525 77.05,64.014 ccw(c77.003,64.014) 77.003,64.061 cw(c77.003,64.264) 76.8,64.264 cw(c77.003,64.264) 77.003,64.467 77.097,64.467 ccw(c77.097,64.67) 77.3,64.67 ccw(c77.097,64.67) 77.097,64.873 77.003,64.873 cw(c77.003,65.076) 76.8,65.076 cw(c77.003,65.076) 77.003,65.279 77.097,65.279 ccw(c77.097,65.482) 77.3,65.482 ccw(c77.097,65.482) 77.097,65.685 77.003,65.685 cw(c77.003,65.888) 76.8,65.888 cw(c77.003,65.888) 77.003,66.091 77.097,66.091 ccw(c77.097,66.294) 77.3,66.294 ccw(c77.097,66.294) 77.097,66.497 cw(c77.097,66.544) 77.05,66.544 v1(77.05,67.375)
  Bottom Layer w0.203: U10.3@75.154,63.663 75.833,64.342 cw(c75.976,64.486) 76.12,64.629 ccw(c76.263,64.773) 76.407,64.916 cw(c76.55,65.06) 76.694,65.204 ccw(c76.838,65.347) 76.981,65.491 cw(c77.125,65.634) 77.268,65.778 77.7,66.209 77.7,67.275 77.6,67.375 v1(77.05,67.375)
SRAM_DQ18: U7.93 U10.6 | length 20.4
  Top Layer w0.203: v1(75.85,66.7) 75.6,66.7 75.425,66.525 75.425,65.7 ccw(c75.628,65.7) 75.628,65.497 76.224,65.497 cw(c76.224,65.294) 76.427,65.294 cw(c76.224,65.294) 76.224,65.091 75.628,65.091 ccw(c75.628,64.888) 75.425,64.888 ccw(c75.628,64.888) 75.628,64.685 76.224,64.685 cw(c76.224,64.482) 76.427,64.482 cw(c76.224,64.482) 76.224,64.279 75.628,64.279 ccw(c75.628,64.076) 75.425,64.076 ccw(c75.628,64.076) 75.628,63.873 76.272,63.873 cw(c76.272,63.67) 76.475,63.67 cw(c76.272,63.67) 76.272,63.467 75.628,63.467 ccw(c75.628,63.264) 75.425,63.264 75.425,62.777 76.002,62.2 76.002,61.9 76.002,61.494 ; 76.002,59.2 U7.93@76.002,57.948 ; 76.002,61.697 76.002,61.494 ; U7.93@76.05,57.9 U7.93@76.002,57.948 ; U7.93@76.002,57.948 76.002,59.261 76.002,59.667 76.002,59.87 ccw(c75.799,59.87) 75.799,60.073 75.755,60.073 cw(c75.755,60.276) 75.552,60.276 cw(c75.755,60.276) 75.755,60.479 75.799,60.479 ccw(c75.799,60.682) 76.002,60.682 ccw(c75.799,60.682) 75.799,60.885 75.755,60.885 cw(c75.755,61.088) 75.552,61.088 cw(c75.755,61.088) 75.755,61.291 75.799,61.291 ccw(c75.799,61.494) 76.002,61.494
  Bottom Layer w0.203: U10.6@73.775,65.042 73.971,65.042 74.605,65.676 75.609,65.676 76.05,66.118 76.05,66.5 v1(75.85,66.7)
SRAM_DQ19: U7.88 U10.7 | length 18.9
  Top Layer w0.203: U7.88@73.55,57.9 73.55,58.881 74.099,59.43 74.099,59.7 ccw(c73.896,59.7) 73.896,59.903 73.727,59.903 cw(c73.727,60.106) 73.524,60.106 cw(c73.727,60.106) 73.727,60.309 74.099,60.309 74.308,60.309 ccw(c74.308,60.512) 74.511,60.512 ccw(c74.308,60.512) 74.308,60.715 74.099,60.715 73.767,60.715 cw(c73.767,60.918) 73.564,60.918 cw(c73.767,60.918) 73.767,61.121 74.099,61.121 74.308,61.121 ccw(c74.308,61.324) 74.511,61.324 ccw(c74.308,61.324) 74.308,61.527 74.099,61.527 73.767,61.527 cw(c73.767,61.73) 73.564,61.73 cw(c73.767,61.73) 73.767,61.933 74.099,61.933 74.308,61.933 ccw(c74.308,62.136) 74.511,62.136 ccw(c74.308,62.136) 74.308,62.339 74.099,62.339 73.767,62.339 cw(c73.767,62.542) 73.564,62.542 cw(c73.767,62.542) 73.767,62.745 74.099,62.745 74.308,62.745 ccw(c74.308,62.948) 74.511,62.948 ccw(c74.308,62.948) 74.308,63.151 74.099,63.151 73.767,63.151 cw(c73.767,63.354) 73.564,63.354 cw(c73.767,63.354) 73.767,63.557 74.099,63.557 74.308,63.557 ccw(c74.308,63.76) 74.511,63.76 ccw(c74.308,63.76) 74.308,63.963 74.099,63.963 73.767,63.963 cw(c73.767,64.166) 73.564,64.166 cw(c73.767,64.166) 73.767,64.369 74.099,64.369 74.308,64.369 ccw(c74.308,64.572) 74.511,64.572 ccw(c74.308,64.572) 74.308,64.775 74.302,64.775 cw(c74.302,64.978) 74.099,64.978 74.099,65.025 v1(74.099,66.285)
  Bottom Layer w0.203: U10.7@73.315,65.502 v1(74.099,66.285)
SRAM_DQ20: U7.87 U10.8 | length 21.5
  Top Layer w0.203: 73.05,60.3 U7.87@73.05,57.9 73.05,60.543 73.05,60.746 ccw(c72.847,60.746) 72.847,60.949 72.156,60.949 cw(c72.156,61.152) 71.953,61.152 cw(c72.156,61.152) 72.156,61.355 72.847,61.355 ccw(c72.847,61.558) 73.05,61.558 ccw(c72.847,61.558) 72.847,61.761 72.156,61.761 cw(c72.156,61.964) 71.953,61.964 cw(c72.156,61.964) 72.156,62.167 72.847,62.167 ccw(c72.847,62.37) 73.05,62.37 ccw(c72.847,62.37) 72.847,62.573 72.156,62.573 cw(c72.156,62.776) 71.953,62.776 cw(c72.156,62.776) 72.156,62.979 72.847,62.979 ccw(c72.847,63.182) 73.05,63.182 ccw(c72.847,63.182) 72.847,63.385 72.156,63.385 cw(c72.156,63.588) 71.953,63.588 cw(c72.156,63.588) 72.156,63.791 72.847,63.791 ccw(c72.847,63.994) 73.05,63.994 73.05,64.197 73.05,64.4 73.05,64.6 73.1,64.65 73.1,66.8 73.528,67.228 74,67.228 v1(74,67.2)
  Bottom Layer w0.203: U10.8@72.855,65.961 72.855,65.97 74,67.115 v1(74,67.2)
SRAM_DQ21: U7.82 U10.9 | length 19.2
  Top Layer w0.203: U7.82@70.55,57.9 70.55,60.5 70.55,60.537 70.55,60.943 70.55,61.146 ccw(c70.347,61.146) 70.347,61.349 69.852,61.349 cw(c69.852,61.552) 69.649,61.552 cw(c69.852,61.552) 69.852,61.755 70.347,61.755 ccw(c70.347,61.958) 70.55,61.958 ccw(c70.347,61.958) 70.347,62.161 69.153,62.161 cw(c69.153,62.364) 68.95,62.364 cw(c69.153,62.364) 69.153,62.567 70.347,62.567 ccw(c70.347,62.77) 70.55,62.77 ccw(c70.347,62.77) 70.347,62.973 69.153,62.973 cw(c69.153,63.176) 68.95,63.176 cw(c69.153,63.176) 69.153,63.379 70.347,63.379 ccw(c70.347,63.582) 70.55,63.582 ccw(c70.347,63.582) 70.347,63.785 69.435,63.785 cw(c69.435,63.988) 69.232,63.988 cw(c69.435,63.988) 69.435,64.191 70.347,64.191 ccw(c70.347,64.394) 70.55,64.394 ; 70.55,64.597 70.55,64.394 ; v1(71.612,65.628) 71.128,65.628 70.55,65.05 70.55,64.8 70.55,64.394
  Bottom Layer w0.203: v1(71.612,65.628) 71.612,65.637 U10.9@72.396,66.421
SRAM_DQ22: U7.81 U10.12 | length 19
  Top Layer w0.203: v1(68.3,62.1) 68.3,61.25 68.45,61.1 ccw(c68.594,61.244) 68.737,61.1 68.98,61.343 cw(c69.124,61.2) 69.267,61.343 cw(c69.124,61.2) 69.267,61.056 68.73,60.518 ccw(c68.873,60.375) 68.73,60.231 ccw(c68.873,60.375) 69.017,60.231 69.168,60.382 69.555,60.769 cw(c69.698,60.626) 69.842,60.769 cw(c69.698,60.626) 69.842,60.482 69.455,60.095 69.068,59.708 ccw(c69.212,59.565) 69.068,59.421 ccw(c69.212,59.565) 69.355,59.421 69.609,59.675 cw(c69.742,59.542) 69.875,59.675 70.05,59.5 U7.81@70.05,57.9
  Bottom Layer w0.203: v1(68.3,62.1) 68.7,62.5 ccw(c68.556,62.644) 68.7,62.787 68.472,63.015 cw(c68.616,63.159) 68.472,63.302 cw(c68.616,63.159) 68.759,63.302 69.131,62.931 69.623,62.438 ccw(c69.767,62.581) 69.911,62.438 ccw(c69.767,62.581) 69.911,62.725 69.5,63.135 cw(c69.582,63.218) 69.5,63.3 69.8,63.6 69.8,66.582 U10.12@71.017,67.8
SRAM_DQ23: U7.57 U10.13 | length 18.7
  Top Layer w0.203: U7.57@57.9,61.55 59.2,61.55 cw(c59.403,61.547) 59.606,61.55 ccw(c59.809,61.553) 60.012,61.55 cw(c60.215,61.547) 60.418,61.55 ccw(c60.621,61.553) 60.824,61.55 cw(c61.027,61.547) 61.23,61.55 ccw(c61.433,61.553) 61.636,61.55 cw(c61.839,61.547) 62.042,61.55 ccw(c62.245,61.553) 62.448,61.55 62.8,61.55 63.45,61.55 63.85,61.95 v1(64.35,61.95)
  Bottom Layer w0.203: v1(64.35,61.95) 64.35,61.902 64.352,61.9 66.5,61.9 68.045,63.445 68.045,63.461 68.313,63.729 68.33,63.729 69.323,64.723 69.323,67.025 U10.13@70.557,68.259
SRAM_DQ24: U7.52 U10.18 | length 20.8
  Top Layer w0.203: U7.52@57.9,64.05 57.949,64.001 58.806,64.001 60.557,62.25 63.2,62.25 ; 63.55,62.6 63.2,62.25 ; 63.574,62.624 63.2,62.25 ; v1(67.675,68.325) 67.675,66.725 67.45,66.5 ccw(c67.594,66.356) 67.45,66.213 67.481,66.182 cw(c67.338,66.038) 67.481,65.895 cw(c67.338,66.038) 67.194,65.895 67.163,65.926 ccw(c67.019,65.782) 66.876,65.926 ccw(c67.019,65.782) 66.876,65.639 66.907,65.608 cw(c66.763,65.464) 66.907,65.321 cw(c66.763,65.464) 66.62,65.321 66.589,65.352 ccw(c66.445,65.208) 66.302,65.352 ccw(c66.445,65.208) 66.302,65.065 66.333,65.033 cw(c66.189,64.89) 66.333,64.746 cw(c66.189,64.89) 66.046,64.746 66.015,64.777 ccw(c65.871,64.634) 65.727,64.777 ccw(c65.871,64.634) 65.727,64.49 65.759,64.459 cw(c65.615,64.316) 65.759,64.172 cw(c65.615,64.316) 65.472,64.172 65.44,64.203 ccw(c65.297,64.06) 65.153,64.203 ccw(c65.297,64.06) 65.153,63.916 65.184,63.885 cw(c65.041,63.742) 65.184,63.598 cw(c65.041,63.742) 64.897,63.598 64.866,63.629 ccw(c64.723,63.486) 64.579,63.629 ccw(c64.723,63.486) 64.579,63.342 64.61,63.311 cw(c64.467,63.167) 64.61,63.024 cw(c64.467,63.167) 64.323,63.024 64.292,63.055 ccw(c64.149,62.911) 64.005,63.055 63.861,62.911 63.2,62.25
  Bottom Layer w0.203: v1(67.675,68.325) 67.675,69.973 U10.18@68.259,70.557
SRAM_DQ25: U7.51 U10.19 | length 19.5
  Top Layer w0.203: U7.51@57.9,64.55 58.827,64.55 60.724,62.653 63.033,62.653 63.28,62.9 63.357,62.977 ccw(c63.214,63.121) 63.357,63.264 63.291,63.331 cw(c63.434,63.474) 63.291,63.618 cw(c63.434,63.474) 63.578,63.618 63.644,63.551 ccw(c63.788,63.695) 63.931,63.551 ccw(c63.788,63.695) 63.931,63.838 63.865,63.905 cw(c64.008,64.048) 63.865,64.192 cw(c64.008,64.048) 64.152,64.192 64.218,64.125 ccw(c64.362,64.269) 64.505,64.125 ccw(c64.362,64.269) 64.505,64.412 64.439,64.479 cw(c64.583,64.622) 64.439,64.766 cw(c64.583,64.622) 64.726,64.766 64.793,64.7 ccw(c64.936,64.843) 65.08,64.7 ccw(c64.936,64.843) 65.08,64.987 65.013,65.053 cw(c65.157,65.197) 65.013,65.34 cw(c65.157,65.197) 65.3,65.34 65.367,65.274 ccw(c65.51,65.417) 65.654,65.274 ccw(c65.51,65.417) 65.654,65.561 65.587,65.627 cw(c65.731,65.771) 65.587,65.914 cw(c65.731,65.771) 65.874,65.914 65.941,65.848 ccw(c66.084,65.991) 66.228,65.848 66.371,65.991 66.515,66.135 66.725,66.345 v1(66.725,67.75)
  Bottom Layer w0.203: v1(66.725,67.75) 66.725,69.942 U10.19@67.8,71.017
SRAM_DQ26: U7.49 U10.22 | length 19.4
  Top Layer w0.203: U7.49@57.9,65.55 57.907,65.556 59.925,65.556 60.581,64.9 63.3,64.9 65.275,66.875 65.275,67.2 65.275,67.302 cw(c65.478,67.302) 65.478,67.505 65.522,67.505 ccw(c65.522,67.708) 65.725,67.708 ccw(c65.522,67.708) 65.522,67.911 65.275,67.911 65.028,67.911 cw(c65.028,68.114) 64.825,68.114 cw(c65.028,68.114) 65.028,68.317 65.275,68.317 65.522,68.317 ccw(c65.522,68.52) 65.725,68.52 ccw(c65.522,68.52) 65.522,68.723 65.275,68.723 65.028,68.723 cw(c65.028,68.926) 64.825,68.926 cw(c65.028,68.926) 65.028,69.129 65.275,69.129 65.522,69.129 ccw(c65.522,69.332) 65.725,69.332 ccw(c65.522,69.332) 65.522,69.535 65.275,69.535 65.028,69.535 cw(c65.028,69.738) 64.825,69.738 cw(c65.028,69.738) 65.028,69.941 65.275,69.941 65.522,69.941 ccw(c65.522,70.144) 65.725,70.144 ccw(c65.522,70.144) 65.522,70.347 65.478,70.347 cw(c65.478,70.55) 65.275,70.55 v1(65.275,71.075)
  Bottom Layer w0.203: v1(65.275,71.075) 65.275,71.25 U10.22@66.421,72.396
SRAM_DQ27: U7.45 U10.23 | length 19.5
  Top Layer w0.203: U7.45@57.9,67.55 59.778,67.55 60.228,67.1 ; 60.65,67.1 60.228,67.1 ; v1(64.3,70.55) 64.3,67.8 63.6,67.1 63.545,67.1 63.492,67.1 ccw(c63.492,66.897) 63.289,66.897 63.289,66.053 cw(c63.086,66.053) 63.086,65.85 cw(c63.086,66.053) 62.883,66.053 62.883,66.897 ccw(c62.68,66.897) 62.68,67.1 ccw(c62.68,66.897) 62.477,66.897 62.477,66.053 cw(c62.274,66.053) 62.274,65.85 cw(c62.274,66.053) 62.071,66.053 62.071,66.897 ccw(c61.868,66.897) 61.868,67.1 ccw(c61.868,66.897) 61.665,66.897 61.665,66.053 cw(c61.462,66.053) 61.462,65.85 cw(c61.462,66.053) 61.259,66.053 61.259,66.897 ccw(c61.056,66.897) 61.056,67.1 60.853,67.1 60.228,67.1
  Bottom Layer w0.203: v1(64.3,70.55) 64.3,71.194 U10.23@65.961,72.855
SRAM_DQ28: U7.43 U10.24 | length 19
  Top Layer w0.203: U7.43@57.9,68.55 59,68.55 ccw(c59,68.753) 59.203,68.753 59.203,68.76 cw(c59.406,68.76) 59.406,68.963 cw(c59.406,68.76) 59.609,68.76 59.609,68.55 59.609,68.155 ccw(c59.812,68.155) 59.812,67.952 ccw(c59.812,68.155) 60.015,68.155 60.015,68.347 cw(c60.218,68.347) 60.218,68.55 cw(c60.218,68.347) 60.421,68.347 60.421,67.853 ccw(c60.624,67.853) 60.624,67.65 ccw(c60.624,67.853) 60.827,67.853 60.827,68.55 60.827,68.823 cw(c61.03,68.823) 61.03,69.026 cw(c61.03,68.823) 61.233,68.823 61.233,68.55 61.233,67.853 ccw(c61.436,67.853) 61.436,67.65 ccw(c61.436,67.853) 61.639,67.853 61.639,68.55 61.639,68.894 cw(c61.842,68.894) 61.842,69.097 cw(c61.842,68.894) 62.045,68.894 62.045,68.55 62.045,67.853 ccw(c62.248,67.853) 62.248,67.65 ccw(c62.248,67.853) 62.451,67.853 62.451,68.347 cw(c62.654,68.347) 62.654,68.55 62.857,68.55 63.075,68.55 63.625,69.1 63.625,71.325 64.286,71.986 v1(64.286,72.128)
  Bottom Layer w0.203: v1(64.286,72.128) 64.34,72.075 65.502,73.237 U10.24@65.502,73.315
SRAM_DQ29: U7.41 U10.25 | length 19
  Top Layer w0.203: U7.41@58.525,69.55 U7.41@57.9,69.55 ; 58.841,69.55 U7.41@57.9,69.55 ; 59.755,69.275 59.725,69.275 ; v1(63.261,71.903) 63.147,71.789 63.147,70.813 63.025,70.691 61.519,70.691 61.397,70.569 61.397,70.407 61.519,70.285 63.025,70.285 63.147,70.163 63.147,69.622 62.922,69.397 62.55,69.397 62.44,69.397 62.237,69.397 cw(c62.237,69.6) 62.034,69.6 62.034,69.744 ccw(c61.831,69.744) 61.831,69.947 ccw(c61.831,69.744) 61.628,69.744 61.628,69.6 cw(c61.425,69.6) 61.425,69.397 61.225,69.397 60.973,69.649 60.973,70.903 60.851,71.025 60.689,71.025 60.567,70.903 60.567,69.397 60.445,69.275 59.725,69.275 ; U7.41@57.9,69.55 59.45,69.55 59.725,69.275
  Bottom Layer w0.203: v1(63.261,71.903) 63.261,72.032 65.004,73.775 U10.25@65.042,73.775
SRAM_DQ30: U7.38 U10.28 | length 19
  Top Layer w0.203: U7.38@58.325,71.001 59.45,71.001 61.502,73.053 62.813,73.053 63.19,73.43 ccw(c63.047,73.574) 63.19,73.717 62.937,73.971 cw(c63.08,74.115) 62.937,74.258 cw(c63.08,74.115) 63.224,74.258 63.621,73.861 64.063,73.419 ccw(c64.206,73.563) 64.35,73.419 ccw(c64.206,73.563) 64.35,73.707 63.511,74.545 cw(c63.654,74.689) 63.511,74.832 cw(c63.654,74.689) 63.798,74.832 64.195,74.435 64.637,73.994 ccw(c64.78,74.137) 64.924,73.994 ccw(c64.78,74.137) 64.924,74.281 64.482,74.722 64.085,75.12 cw(c64.228,75.263) 64.085,75.407 cw(c64.228,75.263) 64.372,75.407 65.211,74.568 ccw(c65.354,74.711) 65.498,74.568 ccw(c65.354,74.711) 65.498,74.855 65.2,75.153 64.486,75.866 v1(64.486,75.953)
  Bottom Layer w0.203: U10.28@63.663,75.154 64.335,75.825 64.358,75.825 v1(64.486,75.953)
SRAM_DQ31: U7.37 U10.29 | length 18.4
  Top Layer w0.203: U7.37@57.9,71.55 59.125,71.55 61.285,73.71 cw(c61.428,73.566) 61.572,73.71 61.766,73.515 ccw(c61.909,73.659) 62.053,73.515 ccw(c61.909,73.659) 62.053,73.802 61.859,73.997 cw(c62.002,74.14) 61.859,74.284 cw(c62.002,74.14) 62.146,74.284 62.178,74.252 ccw(c62.321,74.395) 62.465,74.252 ccw(c62.321,74.395) 62.465,74.539 62.433,74.571 cw(c62.577,74.714) 62.433,74.858 cw(c62.577,74.714) 62.72,74.858 62.752,74.826 ccw(c62.896,74.969) 63.039,74.826 ccw(c62.896,74.969) 63.039,75.113 62.685,75.467 cw(c62.829,75.61) 62.685,75.754 cw(c62.829,75.61) 62.973,75.754 63.151,75.576 63.326,75.4 ccw(c63.47,75.544) 63.613,75.4 ccw(c63.47,75.544) 63.613,75.687 63.581,75.719 cw(c63.725,75.863) 63.581,76.006 64.185,76.61 64.4,76.61 64.456,76.61 ccw(c64.456,76.757) 64.603,76.757 cw(c64.806,76.757) 64.806,76.96 cw(c64.806,76.757) 65.009,76.757 65.009,76.61 65.009,76.463 ccw(c65.212,76.463) 65.212,76.26 ccw(c65.212,76.463) 65.415,76.463 cw(c65.562,76.463) 65.562,76.61 65.793,76.61 65.9,76.503 v1(65.9,76.1)
  Bottom Layer w0.203: U10.29@63.203,75.613 64.2,76.61 64.758,76.61 65.268,76.1 v1(65.9,76.1)
SRAM_MODE: R48.1 U7.68 U10.31 | length 32.9
  Top Layer w0.203: U7.68@63.502,58 63.502,60.002 68.8,65.3 68.8,76.528 67.872,77.456 67.143,77.456 67,77.6 v1(66.9,77.5)
  Top Layer w0.254: R48.1@62.25,53 62.25,53.584 63.682,55.016 63.682,56.782 63.55,56.914 U7.68@63.55,57.9
  Bottom Layer w0.203: U10.31@62.921,77.947 63.451,77.416 66.816,77.416 v1(66.9,77.5)
SRAM_OE_N: R44.2 U7.111 U10.86 | length 14.8
  Top Layer w0.203: v1(84.765,62.39) 85.05,62.105 U7.111@85.05,58.1 ; U7.111@85.002,58.1 85.099,58.003 85.099,56.994 85.1,56.993 R44.2@85.1,55.05
  Bottom Layer w0.203: U10.86@84.381,69.355 84.381,69.159 84.912,68.629 84.912,63.465 84.894,63.447 84.894,62.903 84.912,62.885 84.912,62.537 v1(84.765,62.39)